# Altium PCB qav90.PcbDoc (part 1 of 3)
Units mm, origin at the board's own origin, x right, y up, seen from the top; angles counter-clockwise.
Board outline 90 x 90 mm, 3 copper layers (Top Layer, Mid-Layer 1, Bottom Layer); 94 components, 77 nets, 335 pads, 152 vias.
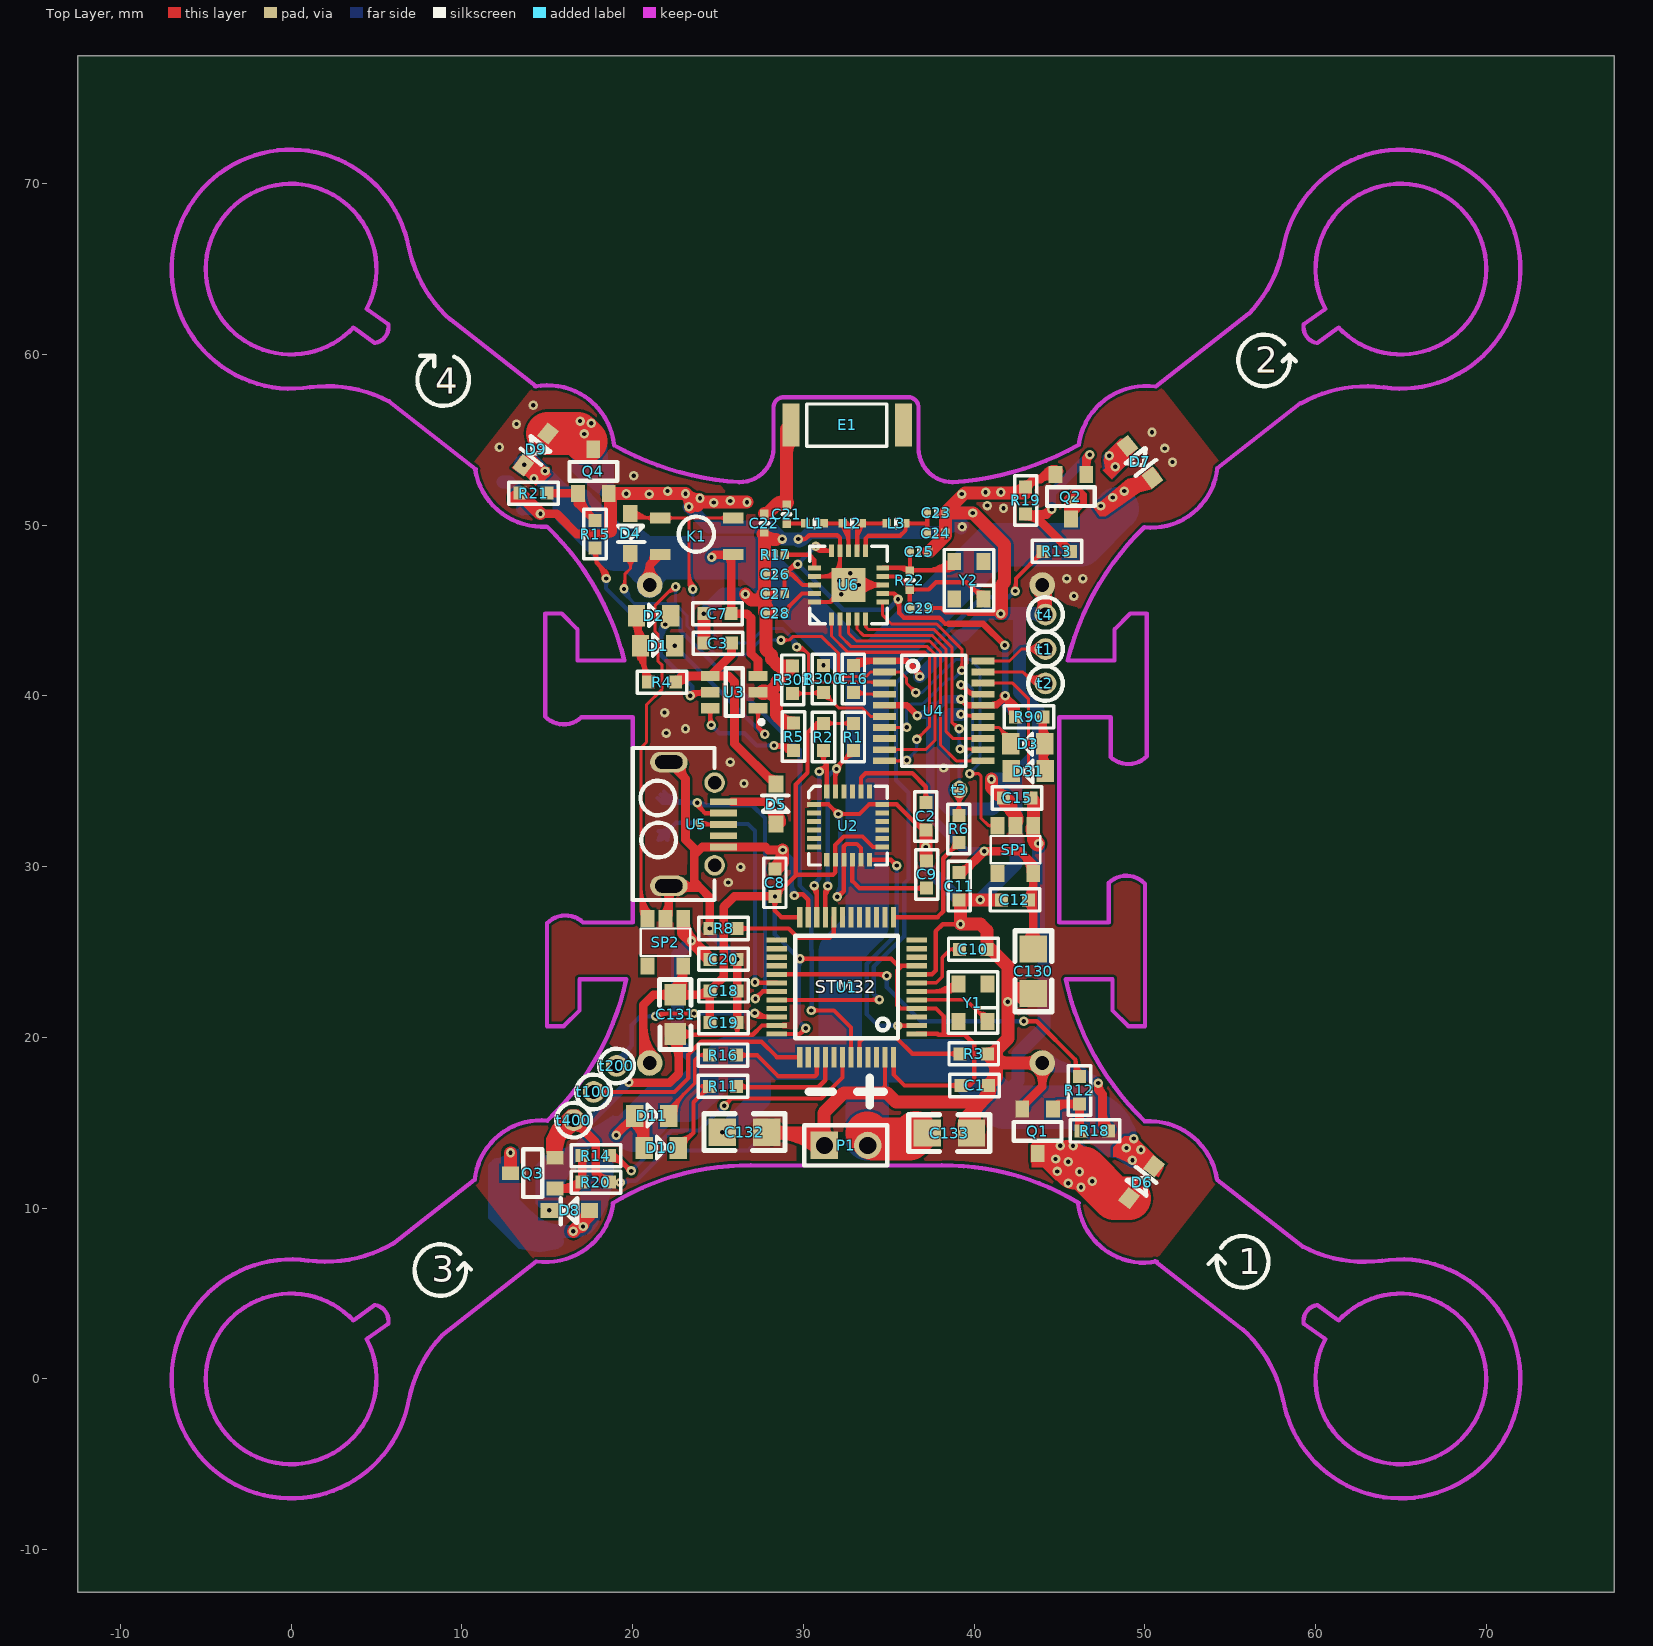
[diagram p0: Top Layer view]
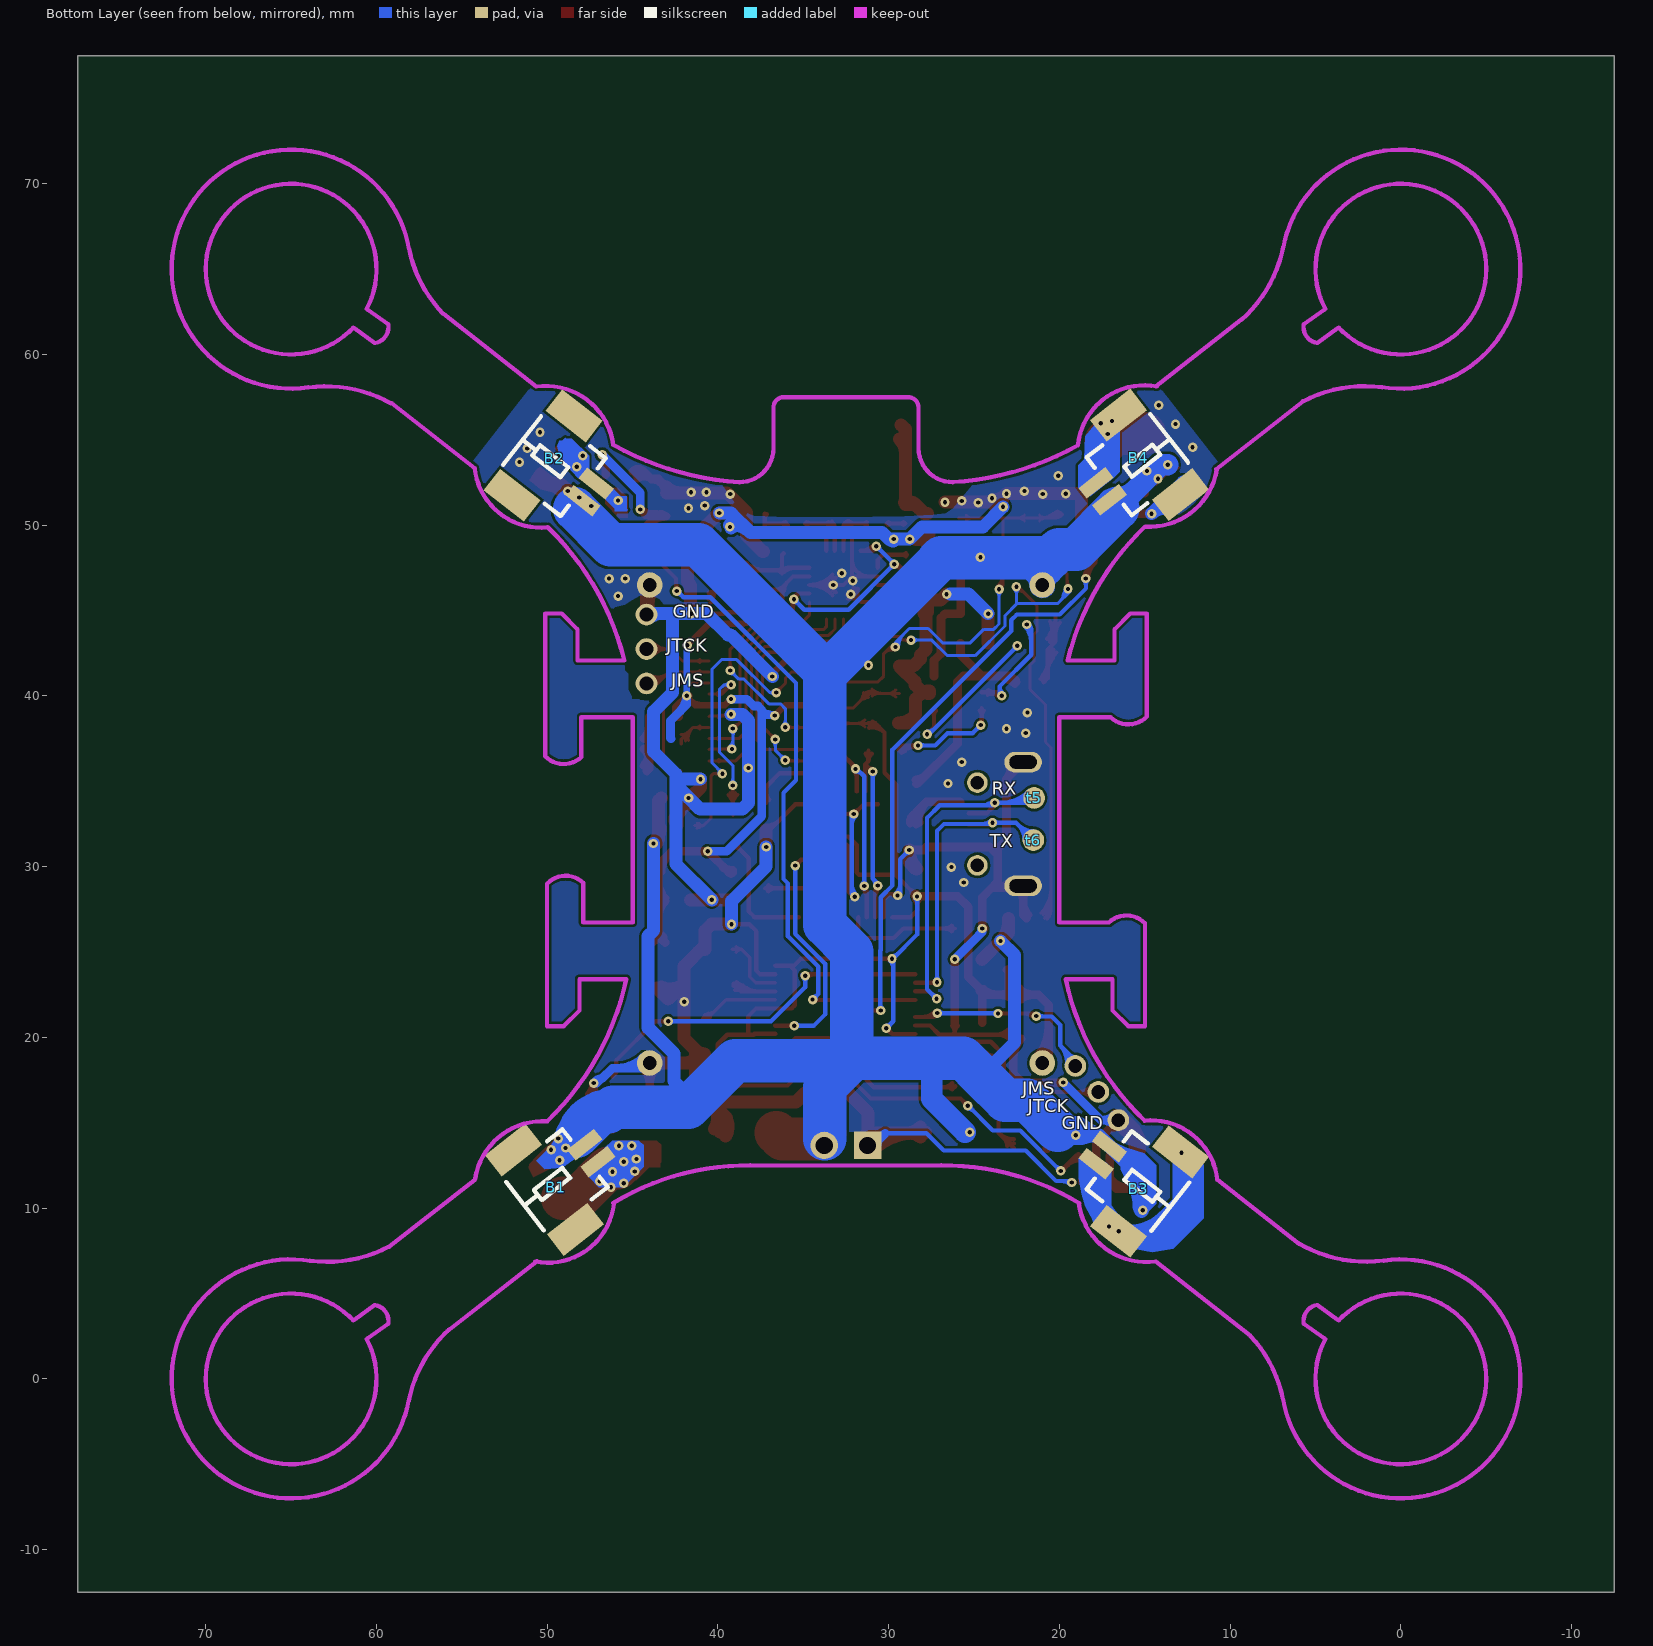
[diagram p1: Bottom Layer view, seen from below]

## Layer stack, top to bottom
Top Layer: signal copper 0.0356
Dielectric: dielectric 0.32, FR-4, Dk 4.8
Mid-Layer 1: signal copper 0.0356
Dielectric: dielectric 0.32, FR-4, Dk 4.8
Bottom Layer: signal copper 0.0356

## Board outline
-12.5,77.5 77.5,77.5 77.5,-12.5 -12.5,-12.5

## Design rules (kind name [scope] priority, off if disabled: settings)
Clearance [All] p1: gap=0.152
ComponentClearance [All] p1: gap=0 collisioncheckmode=3 verticalgap=0 showdistances=FALSE
HoleToHoleClearance [All] p1: gap=0 allowstackedmicrovias=FALSE
MinimumSolderMaskSliver [All] p1: minsoldermaskwidth=0
PlaneConnect [All] p1: planeconnectstyle=Direct reliefexpansion=0.508 reliefentries=4 reliefconductorwidth=0.254 reliefairgap=0.254
PolygonConnect [All] p1: connectstyle=Direct reliefconductorwidth=0.254 reliefentries=4 polygonreliefangle="90 Angle" airgapwidth=0.254
RoutingLayers [All] p1: top layer_v5=TRUE mid layer 1_v5=FALSE bottom layer_v5=TRUE
RoutingVias [All] p1: holewidth=0.25 width=0.55 viastyle="Through Hole" minholewidth=0.25 minwidth=0.55 maxholewidth=0.5 maxwidth=1.5
SilkToSilkClearance [All] p1: silktosilkclearance=0
SilkToSolderMaskClearance [IsPad] p1: minsilkscreentomaskgap=0 clearancetoexposedcopper=TRUE
SolderMaskExpansion [All] p1: expansion=0.102
Width [All] p1: maxlimit=2.54 minlimit=0.178 preferedwidth=0.254 toplayer_prefwidth=0.178 midlayer1_minwidth=0.254 midlayer1_maxwidth=0.254 bottomlayer_prefwidth=0.178 minimp=50.000000 maximp=50.000000 favimp=50.000000
21 further rules are at their usual default settings.

## Components (designator, comment, footprint, x,y, rotation, side; value= is the part's Value field where it differs from the comment)
B1 "Motor" CONN1.27*2 49.025,7.2 r142 bottom
B2 "Motor" CONN1.27*2 53.75,52.05 r218 bottom
B3 "Motor" CONN1.27*2 11.225,13 r38 bottom
B4 "Motor" CONN1.27*2 15.85,58 r322 bottom
C1 "104" 0603C 40.832,17.185 r180 top
C2 "C2.2nF" 0603C 37.175,33.746 r270 top
C3 "C1uF" 0603C 24.195,43.093 r0 top
C7 "C10uF" 0603C 25.77,44.82 r180 top
C8 "104" 0603C 28.336,29.86 r270 top
C9 "104" 0603C 37.226,30.342 r270 top
C10 "C1uF" 0603C 39.156,25.161 r0 top
C11 "104" 0603C 39.131,28.056 r90 top
C12 "C10uF" 0603C 43.195,28.056 r180 top
C15 "C1uF" 0603C 41.721,34.025 r0 top
C16 "C1uF" 0603C 32.933,41.798 r270 top
C18 "104" 0603C 26.126,22.722 r180 top
C19 "C10uF" 0603C 24.526,20.868 r0 top
C20 "C1uF" 0603C 26.126,24.576 r180 top
C21 "1.5pF" 0402 29.025,50.1 r90 top
C22 "1.0pF" 0402 27.725,49.575 r90 top
C23 "2.2nF" 0402 38.331,50.726 r180 top
C24 "4.7pF" 0402 38.318,49.545 r180 top
C25 "22pF" 0402 37.327,48.452 r180 top
C26 "10nF" 0402 27.802,47.132 r0 top
C27 "100nF" 0402 27.802,45.989 r0 top
C28 "33nF" 0402 27.802,44.846 r0 top
C29 "22pF" 0402 37.353,45.15 r180 top
C130 "100uF" 1206 43.475,25.175 r270 top
C131 "22uF" 0805 22.5,22.5 r270 top
C132 "100uF" 1206 25.25,14.45 r0 top
C133 "100uF" 1206 37.25,14.4 r0 top
D1 "LED-B" LED 20.462,42.941 r0 top
D2 "LED-G" LED 20.233,44.693 r0 top
D3 "LED-G" LED 44.15,37.2 r180 top
D4 "BAT54WS" LC-SOD-323F 19.877,49.519 r90 top
D5 "BAT54WS" LC-SOD-323F 28.386,33.67 r270 top
D6 "BAT54WS" LC-SOD-323F 49.8,11.525 r232 top
D7 "BAT54WS" LC-SOD-323F 49.725,53.725 r128 top
D8 "BAT54WS" LC-SOD-323F 16.3,9.85 r0 top
D9 "BAT54WS" LC-SOD-323F 14.329,54.429 r52 top
D10 "LED-B" LED 20.675,13.525 r0 top
D11 "LED-R" LED 20.125,15.4 r0 top
D31 "LED-R" LED 44.175,35.6 r180 top
E1 "Antenna" ANT6520 29.275,55.875 r0 top
K1 "KEY-PB" KEY_ALPS 21.609,50.426 r0 top
L1 "3.9nH" 0402 31.206,50.103 r180 top
L2 "8.2nH" 0402 33.416,50.103 r180 top
L3 "2.7nH" 0402 35.981,50.103 r180 top
P1 "Head2" HEAD2 33.775,13.675 r90 top
Q1 "SI2302" SOT-23-3 44.625,15.8 r180 top
Q2 "SI2302" SOT-23-3 46.575,52.975 r180 top
Q3 "SI2302" SOT-23-3 15.45,11.15 r90 top
Q4 "SI2302" SOT-23-3 16.8,51.85 r0 top
R1 "R10K" 0603R 32.933,36.794 r90 top
R2 "R10K" 0603R 31.18,36.794 r90 top
R3 "R10K" 0603R 39.181,19.039 r0 top
R4 "R1K" 0603R 20.919,40.807 r0 top
R5 "R1.5K" 0603R 29.428,38.419 r270 top
R6 "R220" 0603R 39.105,33.009 r270 top
R8 "R10K" 0603R 24.526,26.38 r0 top
R11 "R2K" 0603R 24.5,17.134 r0 top
R12 "R100R" 0603R 46.175,16.1 r90 top
R13 "R100R" 0603R 45.65,48.475 r180 top
R14 "R100R" 0603R 17.05,13.075 r0 top
R15 "R100R" 0603R 17.8,50.275 r270 top
R16 "R2K" 0603R 24.5,18.963 r0 top
R17 "22K" 0402 28.902,48.275 r180 top
R18 "R10K" 0603R 46.275,14.525 r0 top
R19 "R10K" 0603R 43.025,52.25 r270 top
R20 "R10K" 0603R 18.65,11.525 r180 top
R21 "R10K" 0603R 13.4,51.875 r0 top
R22 "R1M" 0402 36.235,47.335 r270 top
R90 "R1K" 0603R 42.425,38.775 r0 top
R300 "R2K" 0603R 31.18,41.798 r270 top
R301 "R2K" 0603R 29.377,40.147 r90 top
SP1 "SP6201-adj" SOT23-5 43.474,32.4 r180 top
SP2 "SP6201-adj" SOT23-5 22.975,26.975 r180 top
t1 "TP" TESTPOINT#1 44.185,42.75 r0 top
t2 "TP" TESTPOINT#1 44.185,40.731 r0 top
t3 "TP" TEST_PAD 39.131,34.508 r0 top
t4 "TP" TESTPOINT#1 44.185,44.769 r0 top
t5 "TP" TESTPOINT#2 21.478,34.025 r0 top
t6 "TP" TESTPOINT#2 21.528,31.561 r0 top
t100 "TP" TESTPOINT#1 17.718,16.804 r90 top
t200 "TP" TESTPOINT#1 19.065,18.328 r90 top
t400 "TP" TESTPOINT#1 16.55,15.153 r90 top
U1 "STM32F103C8T6" STM32C8T6 31.688,21.046 r0 top locked
U2 "MPU6050" QFN24-1 30.625,33.65 r270 top locked
U3 "Tp4059" LC-SOT-23-6 25.948,40.223 r0 top locked
U4 "STM32F030F3" TSSOP20 34.762,42.052 r270 top locked
U5 "Micro USB" MICRO_USB_T 24.8,34.925 r180 top locked
U6 "NRF24l01" QFN20-4X4 31.65,44.5 r90 top locked
Y1 "12M" XTAL3225 41.086,20.538 r90 top
Y2 "16M" XTAL3225 40.85,45.281 r90 top

## Footprints (in the part's own frame and the unit in brackets; to place one, negate y for a bottom-side part, rotate by r counter-clockwise, add the part's x,y. Pads: shape width x height; smd on the part's side, far side on the other; paste and mask are expansions set on the pad)
0402 [mm]
  rect 0.5x0.5 smd: 1(0,0) 2(1.1,0)
  silkscreen extent 0.55,-0.23 0.55,0.23
0603C [mil]
  rect 30x30 smd: 1(0,0) 2(62.99,0)
  silkscreen extent -26,-26 89,26
0603R [mil]
  rect 30x30 smd: 1(0,0) 2(62.99,0)
  silkscreen extent -26,-26 89,26
0805 [mm]
  rect 1.27x1.27 smd: 1(0,0) 2(2.3,0)
  silkscreen extent -0.9,-0.92 3.2,0.93
1206 [mm]
  rect 1.6x1.6 smd: 1(0,0) 2(2.6,0)
  silkscreen extent -1.07,-1.07 3.67,1.07
ANT6520 [mm]
  rect 1x2.5 smd: 1(0,0) 2(6.6,0)
  silkscreen extent 0.92,-1.25 5.6,1.22
CONN1.27*2 [mm]
  rect 3x1.6 smd: 0(1.5,0.8) 0(1.5,6.7)
  rect 2x0.8 smd: 1(4.975,3.115) 2(4.975,4.385)
  silkscreen extent 0,1.6 4.5,5.9
HEAD2 [mm]
  rect 1.6x1.6 hole 1: 1(0,2.54)
  round 1.6 hole 1: 2(0,0)
  silkscreen extent -1.17,-1.15 1.17,3.72
KEY_ALPS [mm]
  rect 1.2x0.65 smd: 1(0,0) 1(4.3,0) 2(0,-2.15) 2(4.3,-2.15)
  silkscreen extent 1.1,-1.98 3.16,0.08
LC-SOD-323F [mm]
  rect 1x0.83 smd: 1(1.18,0.025) 1(1.18,0) 2(-1.18,0.025) 2(-1.18,0)
  silkscreen extent -0.5,-0.8 0.45,0.72, body extent -1.4,-0.67 1.4,0.68, height 0.75
LC-SOT-23-6 [mm]
  rect 1.1x0.6 smd: 1(1.4,-0.95) 2(1.4,0) 3(1.4,0.95) 4(-1.4,0.95) 5(-1.4,0) 6(-1.4,-0.95)
  silkscreen extent -0.5,-1.87 1.73,1.4
LED [mil]
  rect 40x50 smd: 1(0,0) 2(78.74,0)
  silkscreen extent 29,-25 49,27
MICRO_USB_T [mm]
  round 1.2 hole 0.8: 0(-0.005,4.85) 0(-0.005,0)
  oval 2.2x1.2 hole 0.8 slot 1.6 at 0 deg: 0(2.675,6.05) 0(2.675,-1.2)
  rect 1.6x0.4 smd: 1(-0.525,1.125) 2(-0.525,1.787) 3(-0.525,2.45) 4(-0.525,3.112) 5(-0.525,3.775)
  silkscreen extent 0,-2.02 4.8,6.88
QFN20-4X4 [mm]
  rect 2x2 smd: 0(2,-1)
  rect 0.75x0.3 smd: 1(0,0) 2(0,-0.5) 3(0,-1) 4(0,-1.5) 5(0,-2) 11(4,-2) 12(4,-1.5) 13(4,-1) 14(4,-0.5) 15(4,0)
  rect 0.3x0.75 smd: 6(1,-3) 7(1.5,-3) 8(2,-3) 9(2.5,-3) 10(3,-3) 16(3,1) 17(2.5,1) 18(2,1) 19(1.5,1) 20(1,1)
  silkscreen extent -0.28,-3.27 4.27,1.28
QFN24-1 [mm]
  rect 0.3x0.8 smd: 1(0,0) 2(0.5,0) 3(1,0) 4(1.5,0) 5(2,0) 6(2.5,0) 13(2.5,4) 14(2,4) 15(1.5,4) 16(1,4) 17(0.5,4) 18(0,4)
  rect 0.8x0.3 smd: 7(3.25,0.75) 8(3.25,1.25) 9(3.25,1.75) 10(3.25,2.25) 11(3.25,2.75) 12(3.25,3.25) 19(-0.75,3.25) 20(-0.75,2.75) 21(-0.75,2.25) 22(-0.75,1.75) 23(-0.75,1.25) 24(-0.75,0.75)
  silkscreen extent -1.05,-0.3 3.55,4.3
SOT23-5 [mm]
  rect 0.8x1 smd: 1(0,0) 2(1.05,0) 3(2.1,0) 4(2.1,2.8) 5(0,2.8)
  silkscreen extent -0.4,0.6 2.5,2.2
SOT-23-3 [mm]
  rect 0.8x1 smd: 1(0,0) 2(1.8,0) 3(0.9,2.6)
  silkscreen extent -0.5,0.75 2.3,1.85
STM32C8T6 [mm]
  rect 1.2x0.3 smd: 1(4.95,-0.85) 2(4.95,-0.35) 3(4.95,0.15) 4(4.95,0.65) 5(4.95,1.15) 6(4.95,1.65) 7(4.95,2.15) 8(4.95,2.65) 9(4.95,3.15) 10(4.95,3.65) 11(4.95,4.15) 12(4.95,4.65) 25(-3.25,4.65) 26(-3.25,4.15) 27(-3.25,3.65) 28(-3.25,3.15) 29(-3.25,2.65) 30(-3.25,2.15) 31(-3.25,1.65) 32(-3.25,1.15) 33(-3.25,0.65) 34(-3.25,0.15) 35(-3.25,-0.35) 36(-3.25,-0.85)
  rect 0.3x1.2 smd: 13(3.6,6) 14(3.1,6) 15(2.6,6) 16(2.1,6) 17(1.6,6) 18(1.1,6) 19(0.6,6) 20(0.1,6) 21(-0.4,6) 22(-0.9,6) 23(-1.4,6) 24(-1.9,6) 37(-1.9,-2.2) 38(-1.4,-2.2) 39(-0.9,-2.2) 40(-0.4,-2.2) 41(0.1,-2.2) 42(0.6,-2.2) 43(1.1,-2.2) 44(1.6,-2.2) 45(2.1,-2.2) 46(2.6,-2.2) 47(3.1,-2.2) 48(3.6,-2.2)
  silkscreen extent -2.16,-1.1 3.86,4.92
TEST_PAD [mm]
  round 1 smd: 1(0,0)
TESTPOINT#1 [mm]
  round 1.27 hole 0.8: 1(0,0)
  silkscreen extent -1.01,-1.02 1.02,1.02
TESTPOINT#2 [mm]
  round 1.27 smd far side: 1(0,0)
  silkscreen extent -1.01,-1.02 1.02,1.02
TSSOP20 [mm]
  rect 0.4x1.35 smd: 1(0,0) 2(0.65,0) 3(1.3,0) 4(1.95,0) 5(2.6,0) 6(3.25,0) 7(3.9,0) 8(4.55,0) 9(5.2,0) 10(5.85,0) 11(5.85,5.75) 12(5.2,5.75) 13(4.55,5.75) 14(3.9,5.75) 15(3.25,5.75) 16(2.6,5.75) 17(1.95,5.75) 18(1.3,5.75) 19(0.65,5.75) 20(0,5.75)
  silkscreen extent -0.33,1 6.17,4.75
XTAL3225 [mm]
  rect 1x0.8 smd: 1(0.4,0.3) 2(2.6,0.3) 3(2.6,2) 4(0.4,2)
  silkscreen extent -0.3,-0.3 3.3,2.6

## Part data
B1 B2 B3 B4: "Motor, General Kind"
C1 C2 C3 C8 C9 C10 C11 C15 C16 C18 C20 C21 C22 C23 C24 C25 C26 C27 C28 C29: library part C0.1uF
C130 C131 C132 C133: library part C100uF
D1 D2 D3 D10 D11 D31: library part LED
D4 D5 D6 D7 D8 D9: library part Diode
E1: "Generic Antenna"
L1 L2 L3: library part Inductor-100uH
Q1 Q2 Q3 Q4: library part MOSFET-N
R5 R11 R16: library part R1K
R6 R17 R22 R300 R301: library part R10K
SP1 SP2: library part SP6201
U4: library part STM32F030F4
U5: library part "MINI USB"
Y1 Y2: library part CRYSTAL, "Crystal"

## Free pads (board coordinates)
  round 1.5 hole 0.8: 0(21,46.5) 1(44,46.5) 2(44,18.5) 3(21,18.5)

## Via types
v1: diameter 0.55, hole 0.25, Top Layer to Bottom Layer, tented both sides, 152 vias

## Nets (pads, with @x,y where several pads share a name; then routed paths per layer and width w, separated by ;. In a path a pad name is that pad's centre, name@x,y a point inside that pad or via, vN(x,y) a via of type N, cw(c..) or ccw(c..) an arc to the next point about the centre after c; other vN are vias at no path point)
2V8: C1.2 C8.2 C18.2 C19.1 C131.1 pad.3 R1.2 R2.2 SP2.5 U1.1 U1.4 U1.9 U1.24 U1.36 U1.48 U2.8 U2.13 | length 117.5
  Top Layer w0.178: R2.2@31.18,38.394 R1.2@32.933,38.394 ; 31.886,38.394 cw(c31.886,39.099) 31.387,38.6 ccw(c31.886,39.099) 31.886,38.394 ; 31.886,38.394 ccw(c31.886,37.689) 31.387,38.187 cw(c31.886,37.689) 31.886,38.394 ; 32.228,38.394 cw(c32.228,37.689) 32.726,38.187 ccw(c32.228,37.689) 32.228,38.394 ; 32.228,38.394 ccw(c32.228,39.099) 32.726,38.6 cw(c32.228,39.099) 32.228,38.394
  Top Layer w0.254: v1(28.336,28.26) 28.336,27.421 28.711,27.046 U1.24@29.788,27.046 ; v1(28.336,28.26) 29.555,29.479 ; U1.36@28.438,20.196 29.797,20.196 v1(30.139,20.538) ; v1(29.809,24.602) 35.143,24.602 35.549,24.196 35.778,24.196 ; 30.612,38.097 ccw(c30.538,38.932) R2.2@31.18,38.394 ; U2.13@34.625,31.15 34.081,31.15 33.466,31.765 32.374,31.765 31.875,31.265 31.875,29.665 31.739,29.529 29.555,29.529 29.555,34.813 30.241,35.498 30.241,37.861 ; U1.48@35.288,18.846 35.288,17.827 35.93,17.185 C1.2@39.232,17.185 ; U1.1@36.638,20.196 36.65,20.208 37.861,20.208 37.91,20.158 38.216,20.158 ; U1.9@36.638,24.196 35.778,24.196 ; C8.2@28.238,28.301 cw(c28.67,28.117) C8.2@28.549,28.571 ; C8.2@28.238,28.301 cw(c28.67,28.117) C8.2@28.549,28.571 ; C8.2@28.238,28.301 cw(c28.67,28.117) C8.2@28.549,28.571 ; 28.336,27.646 cw(c28.949,27.646) 28.515,28.08 ccw(c28.949,27.646) 28.336,27.646 ; 28.336,27.646 ccw(c27.722,27.646) 28.156,28.08 cw(c27.722,27.646) 28.336,27.646 ; C8.2@28.336,27.902 cw(c28.693,27.902) 28.44,28.155 ccw(c28.693,27.902) C8.2@28.336,27.902 ; C8.2@28.336,27.902 ccw(c27.978,27.902) 28.231,28.155 cw(c27.978,27.902) C8.2@28.336,27.902 ; C8.2@28.377,28.162 ccw(c28.193,28.594) C8.2@28.647,28.472 ; C8.2@28.377,28.162 ccw(c28.193,28.594) C8.2@28.647,28.473 ; C8.2@28.377,28.162 ccw(c28.193,28.594) C8.2@28.647,28.473 ; 29.886,20.285 cw(c30.139,20.032) 30.139,20.39 ccw(c30.139,20.032) 29.886,20.285 ; 29.886,20.285 ccw(c29.634,20.538) 29.991,20.538 cw(c29.634,20.538) 29.886,20.285 ; 30.166,24.602 cw(c30.166,24.959) 29.913,24.706 ccw(c30.166,24.959) 30.166,24.602 ; 30.166,24.602 ccw(c30.166,24.244) 29.913,24.497 cw(c30.166,24.244) 30.166,24.602 ; 30.241,37.861 cw(c30.961,37.141) 31.137,38.144 ccw(c30.961,37.141) 30.241,37.861 ; 30.241,37.861 30.774,38.394 ; 30.774,38.394 cw(c30.774,38.195) 30.952,38.282 ccw(c30.774,38.195) 30.774,38.394 ; 30.774,38.394 ccw(c30.774,38.592) 30.952,38.505 cw(c30.774,38.592) 30.774,38.394 ; 30.774,38.394 R2.2@31.18,38.394 ; R2.2@31.18,38.394 ccw(c31.064,37.728) 30.586,38.206 cw(c31.064,37.728) R2.2@31.18,38.394 ; 35.778,24.196 35.498,23.916 35.498,21.884 35.687,21.696 37.769,21.696 38.216,21.249 38.216,20.158 ; 38.216,20.158 39.459,20.158 40.02,19.598 40.02,17.464 ; 38.619,17.185 cw(c38.619,16.572) 39.053,17.005 ccw(c38.619,16.572) 38.619,17.185 ; 38.619,17.185 ccw(c38.619,17.798) 39.053,17.365 cw(c38.619,17.798) 38.619,17.185 ; C1.2@39.232,17.185 ccw(c39.48,17.562) 39.799,17.243 cw(c39.48,17.562) C1.2@39.232,17.185 ; C1.2@39.232,17.185 39.74,17.185 ; 39.74,17.185 cw(c39.74,17.565) 39.436,17.337 ccw(c39.74,17.565) 39.74,17.185 ; 39.74,17.185 ccw(c39.74,16.804) 39.436,17.033 cw(c39.74,16.804) 39.74,17.185 ; 39.74,17.185 40.02,17.464 ; 40.02,17.464 cw(c39.654,17.83) 39.372,17.397 ccw(c39.654,17.83) 40.02,17.464 ; C8.2@28.336,28.408 ccw(c28.336,28.765) 28.589,28.512 cw(c28.336,28.765) C8.2@28.336,28.408 ; C8.2@28.336,28.514 ccw(c28.336,29.127) 28.77,28.693 cw(c28.336,29.127) C8.2@28.336,28.514 ; C8.2@28.484,28.26 cw(c28.84,28.26) 28.588,28.512 ccw(c28.84,28.26) C8.2@28.484,28.26 ; C8.2@28.59,28.26 cw(c29.202,28.26) 28.769,28.693 ccw(c29.202,28.26) C8.2@28.59,28.26
  Top Layer w0.508: 20.625,19.376 ccw(c21.876,19.376) pad.3@20.992,18.492 ; 20.625,20.603 ccw(c23.103,20.603) pad.3@21.351,18.851 ; pad.3@21,18.5 20.625,18.875 20.625,21.9 21.225,22.5 C131.1@22.5,22.5 24.431,22.5 C18.2@24.526,22.595 ; C131.1@22.231,22.231 ccw(c21.58,21.58) 21.58,22.5 ccw(c21.58,23.42) C131.1@22.231,22.769 ; C131.1@22.298,22.823 ccw(c21.562,24) 22.95,24 C131.1@22.95,22.8 ; C131.1@22.567,22.392 ccw(c22.135,23.083) C131.1@22.95,23.083 ; C131.1@22.769,22.231 cw(c23.42,21.58) 23.42,22.5 cw(c23.42,23.42) C131.1@22.769,22.769 ; 22.95,23.662 cw(c23.388,23.662) SP2.5@23.078,23.972 ; 23.683,22.5 ccw(c23.683,23.565) C18.2@24.436,22.812 ; C19.1@24.526,20.868 C18.2@24.526,22.595 ; C18.2@24.526,22.468 C18.2@24.526,22.595 ; C18.2@24.653,22.722 C18.2@24.526,22.595 ; v1(28.336,28.26) 25.948,28.26 25.338,27.65 25.338,23.535 C18.2@24.526,22.722 C18.2@24.526,22.595
  Bottom Layer w0.254: v1(28.336,28.26) 28.336,26.024 29.733,24.627 29.733,20.944 v1(30.139,20.538) ; 28.336,27.902 cw(c28.693,27.902) 28.44,28.155 ccw(c28.693,27.902) 28.336,27.902 ; 28.336,27.902 ccw(c27.978,27.902) 28.231,28.155 cw(c27.978,27.902) 28.336,27.902 ; 29.886,20.79 cw(c29.634,20.538) 29.991,20.538 ccw(c29.634,20.538) 29.886,20.79 ; 29.886,20.79 ccw(c30.139,21.043) 30.139,20.686 cw(c30.139,21.043) 29.886,20.79 ; 29.469,24.89 ccw(c29.809,25.23) 29.809,24.75 cw(c29.809,25.23) 29.469,24.89 ; 29.733,24.061 cw(c30.35,24.061) 29.913,24.497 ccw(c30.35,24.061) 29.733,24.061
4V3: B1.2 B2.1 B3.1 B4.2 C7.1 C15.2 C20.2 C132.1 C133.1 D6.2 D7.2 D8.2 D9.2 D10.1 D11.1 K1.2 P1.2 pad.0 R300.1 SP1.1 SP2.1 U3.3 | length 184
  Top Layer w0.508: v1(19.05,14.275) 19.05,14.325 D11.1@20.125,15.4 20.725,14.8 ; 19.475,14.75 cw(c20.125,14.099) D11.1@20.125,15.019 ; D11.1@19.964,15.076 cw(c18.653,13.472) D10.1@20.725,13.472 ; D11.1@20.142,15.02 cw(c20.191,14.266) 20.725,14.8 ; D11.1@20.286,15.47 cw(c19.529,14.543) 20.725,14.543 ; D10.1@20.455,13.779 ccw(c19.919,14.089) 20.517,14.249 ; D10.1@20.495,13.832 ccw(c19.941,14.386) 20.725,14.386 ; 20.519,14.241 ccw(c21.106,14.398) D10.1@20.802,13.872 ; pad.0@20.656,46.857 ccw(c19.875,47.667) 21,47.667 ; D10.1@20.675,13.525 20.725,13.575 20.725,14.8 ; pad.0@21,46.5 21,47.667 ; 21.018,47.685 ccw(c20.427,48.276) K1.2@21.263,48.276 ; pad.0@21.344,46.857 cw(c22.125,47.667) 21,47.667 ; K1.2@21.609,48.276 21,47.667 ; v1@24.642,48.107 cw(c25.048,47.701) 25.048,48.276 ; v1@24.642,48.137 24.781,48.276 K1.2@25.909,48.276 25.77,48.137 C7.1@25.77,44.82 26.685,44.82 26.939,44.566 26.939,42.483 27.348,42.074 U3.3@27.348,41.173 ; K1.2@25.583,48.225 cw(c25.132,47.774) 25.77,47.774
  Top Layer w0.762: SP2.1@22.975,26.975 22.975,26.127 v1(23.451,25.651) ; SP2.1@22.994,26.874 ccw(c24.564,26.764) v1(23.451,25.651) ; C20.2@24.526,24.576 v1(23.451,25.651) ; SP1.1@43.393,32.3 ccw(c44.71,32.29) v1(43.779,31.358) ; C15.2@43.475,33.654 ccw(c42.951,33.654) C15.2@43.321,34.025 43.475,33.872 43.475,32.401 SP1.1@43.474,32.4 43.474,31.663 ; SP1.1@43.493,32.296 ccw(c44.516,32.096) v1(43.779,31.358) ; 43.474,31.663 ccw(c43.913,31.663) 43.736,31.261 cw(c43.913,31.663) 43.474,31.663 ; 43.474,31.663 v1(43.779,31.358) ; 43.474,31.838 ccw(c44.259,31.838) 43.704,31.283 cw(c44.259,31.838) 43.474,31.838
  Top Layer w2.54: P1.2@33.746,14.391 34.087,14.049 36.221,14.049 C133.1@36.591,14.419
  Bottom Layer w0.508: v1(25.25,14.45) v1@25.525,14.45
  Bottom Layer w0.762: v1(15.12,9.875) 15.325,10.08 15.325,11.87 B3.1@17.063,13.608 ; v1@15.195,9.8 ccw(c14.881,10.114) 15.325,10.114 ; v1(23.451,25.651) 22.625,24.825 22.625,19.7 24.504,17.821 24.504,17.659 ; 41.391,16.245 42.585,17.439 42.585,19.065 44.084,20.563 44.084,25.948 43.779,26.253 v1(43.779,31.358)
  Bottom Layer w1.27: v1(13.651,53.548) 14.052,53.548 16.118,51.482 B4.2@17.071,51.482 ; 15.55,52.05 ccw(c16.598,53.098) B4.2@16.598,51.616 ; v1@25.525,14.45 27.475,16.4 27.475,18.785
  Bottom Layer w2.54: 16.589,51 19.015,48.575 20.022,48.575 20.504,48.092 ; 20.104,14.546 21.886,16.328 23.172,16.328 24.504,17.659 25.63,18.785 27.45,18.785 ; 21,47.652 20.944,47.652 20.504,48.092 ; 27.475,18.785 32.196,18.785 ; P1.2@33.746,14.05 33.746,17.083 32.196,18.633 ; 33.746,41.454 41.141,48.85 46.283,48.85 48.393,50.96 ; 48.162,14.345 ccw(c46.422,13.806) 46.422,15.628 ; 48.286,14.2 46.858,15.628 46.422,15.628 ; 20.504,48.092 26.918,48.092 27.095,47.915 27.095,47.894 33.746,41.243 33.746,26.608 32.173,25.036 32.173,18.809 32.196,18.785 ; 32.196,18.633 32.196,18.785 ; 32.196,18.633 39.004,18.633 41.391,16.245 41.736,15.9 46.15,15.9 46.422,15.628
  other v1: 49.275,12.8 49.775,13.425 48.925,13.525 49.35,14.075 31.18,41.798 24.627,48.122 47.425,51.125 48.125,51.625 48.8,52 14.225,52.725 14.875,53.175
AD-BAT: R300.2 R301.1 U4.6 | length 15.1
  Top Layer w0.178: R301.1@29.377,40.147 R300.2@31.129,40.147 ; R300.2@31.118,40.185 ccw(c31.568,40.277) R300.2@31.449,39.833 ; R300.2@31.18,40.198 32.095,39.283 33.466,39.283 33.948,38.802 U4.6@34.762,38.802 ; R300.2@31.193,40.26 cw(c31.101,39.81) R300.2@31.545,39.929 ; 30.082,40.147 cw(c30.082,40.852) 29.584,40.353 ccw(c30.082,40.852) 30.082,40.147 ; 30.082,40.147 ccw(c30.082,39.441) 29.584,39.94 cw(c30.082,39.441) 30.082,40.147 ; 31.679,39.699 cw(c32.178,40.198) 31.473,40.198 ccw(c32.178,40.198) 31.679,39.699 ; 31.679,39.699 ccw(c31.18,39.2) 31.18,39.905 cw(c31.18,39.2) 31.679,39.699 ; 34.019,38.802 cw(c34.019,38.533) 34.208,38.723 ccw(c34.019,38.533) 34.019,38.802 ; 34.019,38.802 ccw(c34.019,39.07) 34.208,38.88 cw(c34.019,39.07) 34.019,38.802 ; 30.352,40.147 ccw(c30.352,41.026) 30.974,40.404 cw(c30.352,41.026) 30.352,40.147 ; 30.598,40.147 cw(c30.598,39.616) 30.974,39.991 ccw(c30.598,39.616) 30.598,40.147 ; 30.781,40.147 ccw(c30.781,40.597) 31.1,40.278 cw(c30.781,40.597) 30.781,40.147
CE: U4.10 U6.1 | length 22.4
  Top Layer w0.178: U6.1@31.65,44.5 31.65,43.512 32.603,42.56 37.124,42.56 37.378,42.306 37.378,38.191 v1(36.641,37.454) ; U4.10@34.762,36.202 36.024,36.202 v1(36.057,36.235) ; v1@36.64,37.462 ccw(c36.573,37.788) 36.894,37.702 ; v1@36.65,37.453 cw(c36.975,37.386) 36.889,37.707 ; 35.505,36.202 cw(c35.505,36.47) 35.315,36.28 ccw(c35.505,36.47) 35.505,36.202 ; 35.505,36.202 ccw(c35.505,35.933) 35.315,36.123 cw(c35.505,35.933) 35.505,36.202 ; 36.959,37.772 cw(c36.641,38.09) 36.641,37.64 ccw(c36.641,38.09) 36.959,37.772 ; 36.959,37.772 ccw(c37.277,37.454) 36.828,37.454 cw(c37.277,37.454) 36.959,37.772 ; 35.527,36.202 ccw(c35.527,36.765) 35.926,36.367 cw(c35.527,36.765) 35.527,36.202 ; 35.689,36.202 cw(c35.689,35.866) 35.926,36.103 ccw(c35.689,35.866) 35.689,36.202
  Bottom Layer w0.178: v1(36.057,36.235) 36.641,36.819 v1(36.641,37.454) ; 36.375,36.553 cw(c36.057,36.87) 36.057,36.421 ccw(c36.057,36.87) 36.375,36.553 ; 36.375,36.553 ccw(c36.693,36.235) 36.243,36.235 cw(c36.693,36.235) 36.375,36.553 ; 36.641,37.005 cw(c37.091,37.005) 36.773,37.323 ccw(c37.091,37.005) 36.641,37.005 ; 36.641,37.005 ccw(c36.192,37.005) 36.51,37.323 cw(c36.192,37.005) 36.641,37.005
CSN: U4.9 U6.2 | length 16
  Top Layer w0.178: U6.2@32.15,44.5 32.15,43.546 32.806,42.89 37.261,42.89 37.708,42.442 37.708,37.403 37.156,36.852 U4.9@34.762,36.852 ; 35.505,36.852 cw(c35.505,37.12) 35.315,36.93 ccw(c35.505,37.12) 35.505,36.852 ; 35.505,36.852 ccw(c35.505,36.583) 35.315,36.773 cw(c35.505,36.583) 35.505,36.852
DSM2: R6.1 t3.1 U4.17 | length 29.3
  Top Layer w0.178: R6.1@39.105,33.009 39.131,33.035 v1(39.131,34.762) ; v1@39.231,40.646 cw(c39.164,40.321) 39.485,40.407 ; v1(39.232,40.655) 39.785,40.102 ; v1@39.234,40.646 cw(c39.288,40.388) 39.518,40.52 ; v1@39.24,40.656 ccw(c39.566,40.723) 39.48,40.402 ; 39.555,40.342 cw(c39.391,39.729) U4.17@39.941,40.046 ; U4.17@40.512,40.102 39.785,40.102 ; 39.131,33.515 cw(c40.123,33.515) 39.421,34.217 ccw(c40.123,33.515) 39.131,33.515 ; 39.131,33.515 ccw(c38.138,33.515) 38.84,34.217 cw(c38.138,33.515) 39.131,33.515 ; 39.131,33.945 cw(c39.694,33.945) 39.296,34.343 ccw(c39.694,33.945) 39.131,33.945 ; 39.131,33.945 ccw(c38.567,33.945) 38.966,34.343 cw(c38.567,33.945) 39.131,33.945 ; t3.1@39.131,34.313 cw(c39.58,34.313) 39.262,34.63 ccw(c39.58,34.313) t3.1@39.131,34.313 ; t3.1@39.131,34.313 ccw(c38.681,34.313) 38.999,34.63 cw(c38.681,34.313) t3.1@39.131,34.313 ; v1@39.28,40.475 cw(c39.337,40.265) 39.445,40.453 ; v1@39.28,40.475 cw(c39.337,40.265) 39.445,40.453 ; v1@39.28,40.475 cw(c39.337,40.265) 39.445,40.453 ; v1@39.412,40.703 ccw(c40.07,40.879) 39.729,40.289 ; v1@39.412,40.703 ccw(c40.07,40.879) 39.729,40.289 ; v1@39.412,40.703 ccw(c40.07,40.879) 39.729,40.289 ; 39.55,40.337 cw(c39.868,40.655) 39.418,40.655 ccw(c39.868,40.655) 39.55,40.337 ; 39.55,40.337 ccw(c39.232,40.019) 39.232,40.468 cw(c39.232,40.019) 39.55,40.337 ; 39.785,40.102 cw(c39.785,39.872) 39.955,40.027 ccw(c39.785,39.872) 39.785,40.102 ; 39.785,40.102 ccw(c39.785,40.331) 39.955,40.176 cw(c39.785,40.331) 39.785,40.102 ; R6.1@38.899,33.216 ccw(c38.339,33.776) 39.131,33.776 cw(c38.339,33.776) R6.1@38.899,33.216 ; 39.131,33.653 ccw(c39.749,33.653) 39.312,33.216 cw(c39.749,33.653) 39.131,33.653 ; v1@39.418,40.469 ccw(c40.037,41.088) 40.037,40.213 cw(c40.037,41.088) v1@39.418,40.469 ; 39.721,40.166 ccw(c40.037,40.481) 40.037,40.035 cw(c40.037,40.481) 39.721,40.166
  Bottom Layer w0.178: v1(39.232,40.655) 39.639,40.655 ; v1@39.258,34.635 v1(39.131,34.762) 39.131,35.93 39.918,36.718 39.918,40.375 39.639,40.655 ; 39.131,35.211 cw(c38.681,35.211) 38.999,34.893 ccw(c38.681,35.211) 39.131,35.211 ; 39.131,35.211 ccw(c39.58,35.211) 39.262,34.893 cw(c39.58,35.211) 39.131,35.211 ; 39.639,40.655 cw(c39.639,41.005) 39.373,40.776 ccw(c39.639,41.005) 39.639,40.655 ; 39.639,40.655 ccw(c39.639,40.304) 39.373,40.533 cw(c39.639,40.304) 39.639,40.655
EN: D4.2 SP1.3 SP2.3 U4.2 | length 89.7
  Top Layer w0.178: v1(19.496,46.268) 19.547,46.319 19.547,47.132 19.877,47.462 ; D4.2@19.633,48.013 cw(c19.133,47.461) 19.877,47.461 ; 19.877,47.527 cw(c20.579,47.527) D4.2@20.083,48.024 ; D4.2@19.877,48.339 19.877,47.462 ; SP2.3@20.5,27.444 ccw(c21.244,27.444) SP2.3@20.718,26.918 ; 20.5,27.873 ccw(c21.673,27.873) SP2.3@20.844,27.044 ; 20.5,28.302 ccw(c22.102,28.302) SP2.3@20.969,27.169 ; 20.5,28.731 ccw(c22.531,28.731) SP2.3@21.095,27.295 ; SP2.3@20.875,26.975 20.5,27.35 20.5,36.975 20.817,37.293 20.817,39.486 21.732,40.401 21.732,41.798 21.478,42.052 21.478,43.626 21.3,43.804 21.3,45.277 22.417,46.395 v1(22.519,46.395) ; 22.209,46.126 ccw(c22.092,46.559) v1@22.511,46.398 ; v1(28.691,43.271) 29.174,43.271 29.377,43.474 31.079,43.474 32.069,42.483 32.069,41.467 32.387,41.15 33.682,41.15 33.934,41.402 U4.2@34.762,41.402 35.691,41.402 36.039,41.053 36.039,40.749 v1(36.591,40.197) ; 36.338,40.445 ccw(c36.659,40.531) v1@36.592,40.206 ; 36.343,40.45 cw(c36.257,40.129) v1@36.582,40.196 ; v1(39.74,35.448) 40.274,35.448 40.4,35.321 40.4,32.857 40.858,32.4 ; SP1.3@41.099,32.254 ccw(c40.858,32.127) 40.858,32.4 ; SP1.3@41.099,32.545 cw(c40.858,32.672) 40.858,32.4 ; SP1.3@41.225,32.25 ccw(c40.864,31.89) 40.864,32.4 ccw(c40.864,32.909) SP1.3@41.225,32.549 ; SP1.3@41.374,32.4 40.858,32.4 ; 19.877,47.467 cw(c20.665,47.467) 20.108,48.024 ccw(c20.665,47.467) 19.877,47.467 ; 19.877,47.467 ccw(c19.09,47.467) 19.647,48.024 cw(c19.09,47.467) 19.877,47.467 ; 29.14,43.271 cw(c29.14,43.72) 28.823,43.402 ccw(c29.14,43.72) 29.14,43.271 ; 29.14,43.271 ccw(c29.14,42.822) 28.823,43.139 cw(c29.14,42.822) 29.14,43.271 ; 34.019,41.402 cw(c34.019,41.133) 34.208,41.323 ccw(c34.019,41.133) 34.019,41.402 ; 34.019,41.402 ccw(c34.019,41.67) 34.208,41.48 cw(c34.019,41.67) 34.019,41.402 ; 35.505,41.402 cw(c35.505,41.67) 35.315,41.48 ccw(c35.505,41.67) 35.505,41.402 ; 35.505,41.402 ccw(c35.505,41.133) 35.315,41.323 cw(c35.505,41.133) 35.505,41.402 ; 36.273,40.515 cw(c35.955,40.197) 36.405,40.197 ccw(c35.955,40.197) 36.273,40.515 ; 36.273,40.515 ccw(c36.591,40.833) 36.591,40.383 cw(c36.591,40.833) 36.273,40.515 ; 40.189,35.448 cw(c40.189,35.897) 39.872,35.579 ccw(c40.189,35.897) 40.189,35.448 ; 40.189,35.448 ccw(c40.189,34.998) 39.872,35.316 cw(c40.189,34.998) 40.189,35.448 ; v1@19.365,46.4 ccw(c18.924,46.84) 19.547,46.84 cw(c18.924,46.84) v1@19.365,46.4 ; 19.547,46.595 ccw(c19.823,46.595) 19.628,46.4 cw(c19.823,46.595) 19.547,46.595 ; 22.028,46.005 cw(c22.519,45.514) 22.519,46.209 ccw(c22.519,45.514) 22.028,46.005 ; 22.273,46.251 ccw(c22.129,46.395) 22.333,46.395 cw(c22.129,46.395) 22.273,46.251
  Bottom Layer w0.178: v1@19.369,46.141 20.106,45.404 22.494,45.404 23.192,44.706 23.192,44.096 24.932,42.356 26.558,42.356 27.472,43.271 v1(28.691,43.271) ; v1@19.445,46.089 cw(c19.385,45.882) 19.593,45.938 cw(c19.82,45.999) v1@19.639,46.149 ; v1@19.492,46.261 cw(c19.175,45.712) 19.788,45.876 ; 22.519,45.43 v1(22.519,46.395) ; v1(36.591,40.197) 36.972,40.197 ; v1(39.74,35.448) 39.74,35.473 40.35,36.083 40.35,41.569 39.791,42.128 38.902,42.128 36.972,40.197 ; 22.519,45.946 cw(c22.968,45.946) 22.651,46.263 ccw(c22.968,45.946) 22.519,45.946 ; 22.519,45.946 ccw(c22.07,45.946) 22.387,46.263 cw(c22.07,45.946) 22.519,45.946 ; 28.242,43.271 cw(c28.242,42.822) 28.56,43.139 ccw(c28.242,42.822) 28.242,43.271 ; 28.242,43.271 ccw(c28.242,43.72) 28.56,43.402 cw(c28.242,43.72) 28.242,43.271 ; 36.972,40.197 cw(c36.972,40.494) 36.737,40.312 ccw(c36.972,40.494) 36.972,40.197 ; 36.972,40.197 ccw(c36.972,39.9) 36.737,40.083 cw(c36.972,39.9) 36.972,40.197 ; v1@19.505,46.268 ccw(c20.138,46.268) 19.69,45.82 cw(c20.138,46.268) v1@19.505,46.268 ; v1@19.683,46.268 ccw(c20.745,46.268) 19.994,45.517 cw(c20.745,46.268) v1@19.683,46.268 ; v1@39.74,35.634 ccw(c39.74,36.022) 40.015,35.747 cw(c39.74,36.022) v1@39.74,35.634 ; v1@39.926,35.448 cw(c40.437,35.448) 40.076,35.809 ccw(c40.437,35.448) v1@39.926,35.448
FCS: U1.25